# Altium PCB MiniCNC_ver2.PcbDoc (part 2 of 2)
Units mil, origin at the board's own origin, x right, y up, seen from the top; angles counter-clockwise.
Board outline 3937.01 x 3740 mil, 2 copper layers (Top Layer, Bottom Layer); 116 components, 92 nets, 444 pads, 109 vias.
Unrouted connection lines stored in the file: 92.
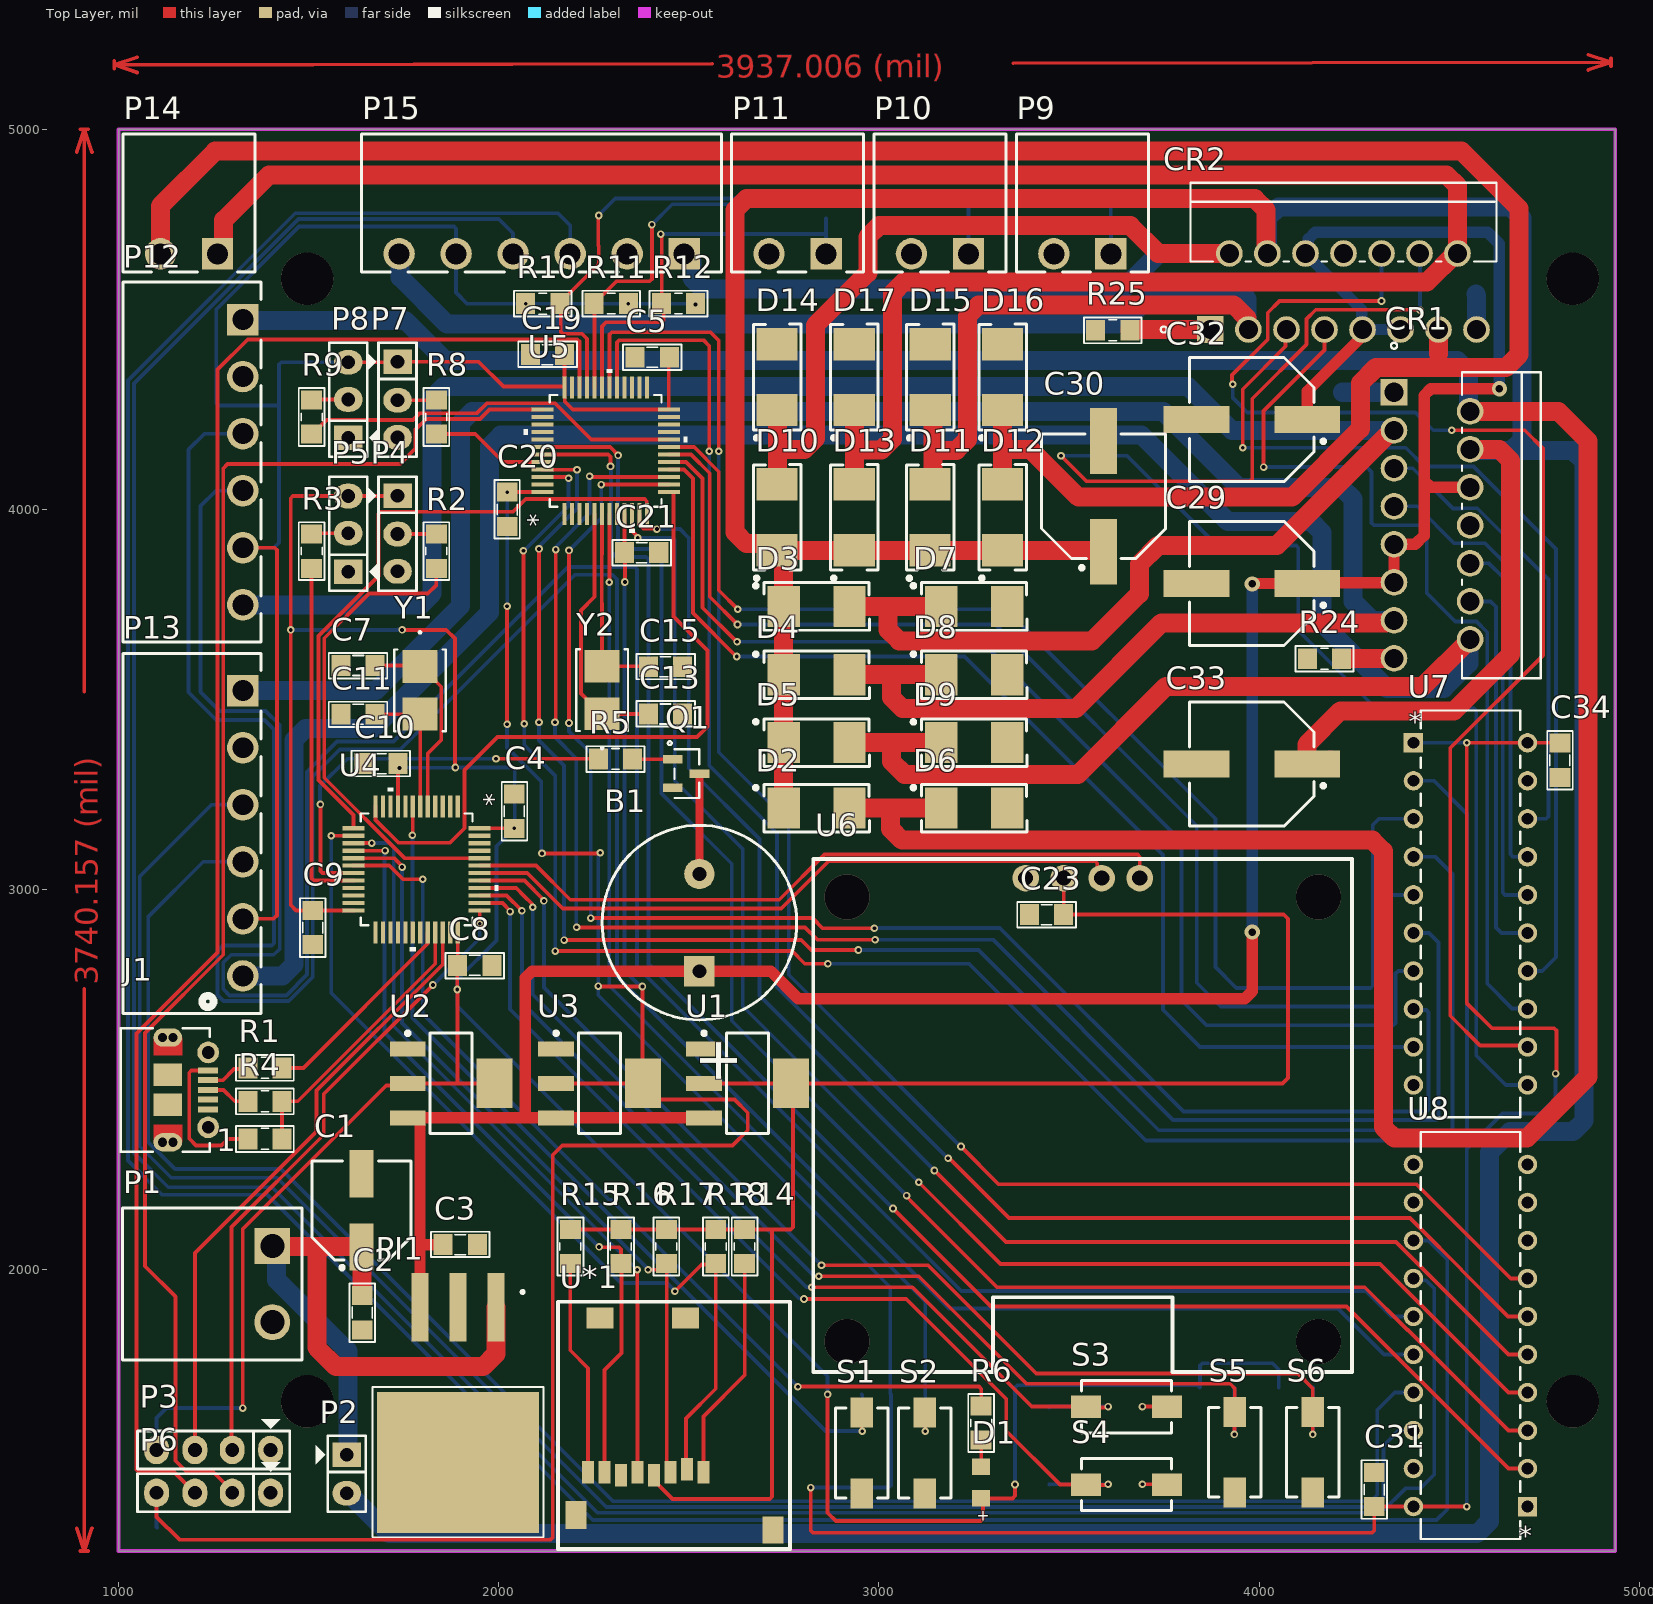
[diagram p0: Top Layer view]

## Via types
v1: diameter 20, hole 10, Top Layer to Bottom Layer, tented both sides, 85 vias
v2: diameter 20, hole 10, Top Layer to Bottom Layer, 17 vias
v3: diameter 118.11, hole 118.11, Top Layer to Bottom Layer, 4 vias
v4: diameter 40, hole 20, Top Layer to Bottom Layer, tented both sides, 3 vias

## Nets (pads, with @x,y where several pads share a name; then routed paths per layer and width w, separated by ;. In a path a pad name is that pad's centre, name@x,y a point inside that pad or via, vN(x,y) a via of type N, cw(c..) or ccw(c..) an arc to the next point about the centre after c; other vN are vias at no path point) (continued)
Y_ENC_B: (continued)
  Bottom Layer w10: P12.4 1256,4049 1216,4009 1216,3520 1266,3470 1387,3470 1424,3433 1424,2844 1408.5,2828.5 1296.36,2828.5 1275.66,2807.8 1275.66,2738.34 1292.34,2721.66 1441.45,2721.66 1496,2776.21 1496,3310 1575,3389 1723,3389 2182,3848 2358.14,3848 2364,3842.14 2364,2797 3216.86,1944.14 4280.86,1944.14 4348,1877 U8.15
Y_PWM_1: CR1.2 D2.2 D6.1 P12.1 | length 8327.6
  Top Layer w50: D2.2@2928.61,3214 3031,3214 ; D6.1@3137.39,3214 3031,3214 ; CR1.2 4787,4258 4865,4180 4865,2507 4705,2347 4514.71,2347 4513.71,2346 4356.29,2346 4327,2375.29 4327,3100.71 4297.71,3130 3060.29,3130 3031,3159.29 3031,3214
  Bottom Layer w50: P12.1 1329,4497 1754,4497 1860,4391 4521.88,4391 4551.17,4361.71 4551.17,4261.83 CR1.2
Y_PWM_2: CR1.3 D3.2 D7.1 P12.6 | length 5503.4
  Top Layer w50: D3.2@2928.61,3745 3024,3745 D7.1@3137.39,3745 ; 3023,3744 3024,3743 3024,3683.29 3053.29,3654 3561,3654 3685,3778 3685,3855.78 3734.22,3905 4046.59,3905 4349.59,4208 CR1.3
  Bottom Layer w50: P12.6 1795.71,3749 1825,3778.29 1825,4293.71 1854.29,4323 3813.5,4323 3928.5,4208 CR1.3
Z_ENC_A: P15.4 U8.14 | length 7677.9
  Bottom Layer w10: P15.4 2038,4726 2000,4764 1473.79,4764 1041,4331.21 1041,2307 1131,2217 1404,2217 2260,1361 4321,1361 4385,1425 4424,1425 4461,1462 4461,1950 4438.64,1972.36 4410.64,1972.36 U8.14
Z_ENC_B: P15.3 U8.13 | length 8125.3
  Bottom Layer w10: P15.3 2188,4747 2156,4779 1465,4779 1025,4339 1025,2287 1115,2197 1392,2197 2247.5,1341.5 4466.5,1341.5 4494.78,1369.78 4494.78,2027.22 4445,2077 U8.13
Z_PWM_1: CR2.2 D10.2 D14.1 P15.1 | length 3408.7
  Top Layer w50: D10.2@2733.38,4055.61 2733.38,4157 ; D14.1@2733.38,4234.39 2733.38,4157 ; CR2.2 3734.45,4673 3661.45,4746 3000.29,4746 2971,4716.71 2971,4622 2833,4484 2833,4186.29 2803.71,4157 2733.38,4157
  Bottom Layer w50: P15.1 2508,4652.14 2508,4608.29 2537.29,4579 3642.17,4579 3736.17,4673 CR2.2
Z_PWM_2: CR2.3 D11.2 D15.1 P15.6 | length 3899.9
  Top Layer w50: D11.2 3142,4073.49 3142,4155 ; D15.1 3142,4254.42 3142,4155 ; CR2.3 3968.17,4476.83 3968.17,4502.71 3932.88,4538 3262.29,4538 3233,4508.71 3233,4184.29 3203.71,4155 3142,4155
  Bottom Layer w50: P15.6 1740.69,4669.45 1740.69,4610.31 1864,4487 3639.5,4487 3737.5,4585 3777,4585 3779,4583 3938.88,4583 3968.17,4553.71 3968.17,4476.83 CR2.3
pads on no net: J1.6 J1.7 J1.10 J1.11 J1.S_1 J1.S_1_H1 J1.S_1_H2 J1.S_2 J1.S_2_H1 J1.S_2_H2 PI1.2 U4.1 U4.2 U4.3 U4.4 U4.10 U4.11 U4.21 U4.22 U4.25 U4.26 U4.27 U4.28 U4.29 U4.30 U4.31 U4.45 U4.46 U5.1 U5.2 U5.3 U5.4 U5.21 U5.22 U5.25 U5.26 U5.27 U5.28 U5.38 U5.39 U5.40 U5.41 U8.8 U8.9 U8.11 U8.12
copper on no net: | length 6689.6
  Top Layer w10: 890,1319.84 910,1259.84 ; 890,4940 910,5000 ; 900,1259.84 920,1259.84 ; 900,5000 920,5000 ; 910,2739.04 910,1259.84 ; 910,3520.8 910,5000 ; 930,1319.84 910,1259.84 ; 930,4940 910,5000 ; 989.02,5159 988.98,5179 ; 1048.96,5189.11 989,5169 ; 1049.04,5149.11 989,5169 ; 2561.62,5171.8 989,5169 ; 3353.38,5173.2 4926,5176 ; 4865.96,5195.89 4926,5176 ; 4866.04,5155.89 4926,5176 ; 4926.02,5166 4925.98,5186
  other v3: 2915.92,1810.71 4156.08,1810.71 2915.92,2980 4156.08,2980

## Keep-outs
Top Layer:
  the board outline again, w10

## Other copper
Top Layer:
  text "3937.006 (mil)" at 2571.69,5135.82 h60 r0.1
  text "3740.157 (mil)" at 945.99,2749.04 h60 r90

## Text inside footprints (layer, text, board x,y; h text height)
B1: Top Overlay "+" at 2628,2485.09 h112.5 r90
D1: Top Overlay "+" at 3257.19,1339.61 h30
U4: Top Overlay "*" at 1939,3253 h50 r270
U5: Top Overlay "*" at 2126.5,3954 h50 r90
U7: Top Overlay "*" at 4393.5,3416.5 h50; Mechanical 13 "*" at 4427.5,3361 h50
U8: Top Overlay "*" at 4718.5,1346.5 h50 r180; Mechanical 13 "*" at 4684.5,1402 h50 r180